# Altium PCB board.PcbDoc
Units mm, origin at the board's own origin, x right, y up, seen from the top; angles counter-clockwise.
Board outline 90 x 100 mm, 2 copper layers (Top Layer, Bottom Layer); 34 components, 42 nets, 133 pads, 0 vias.
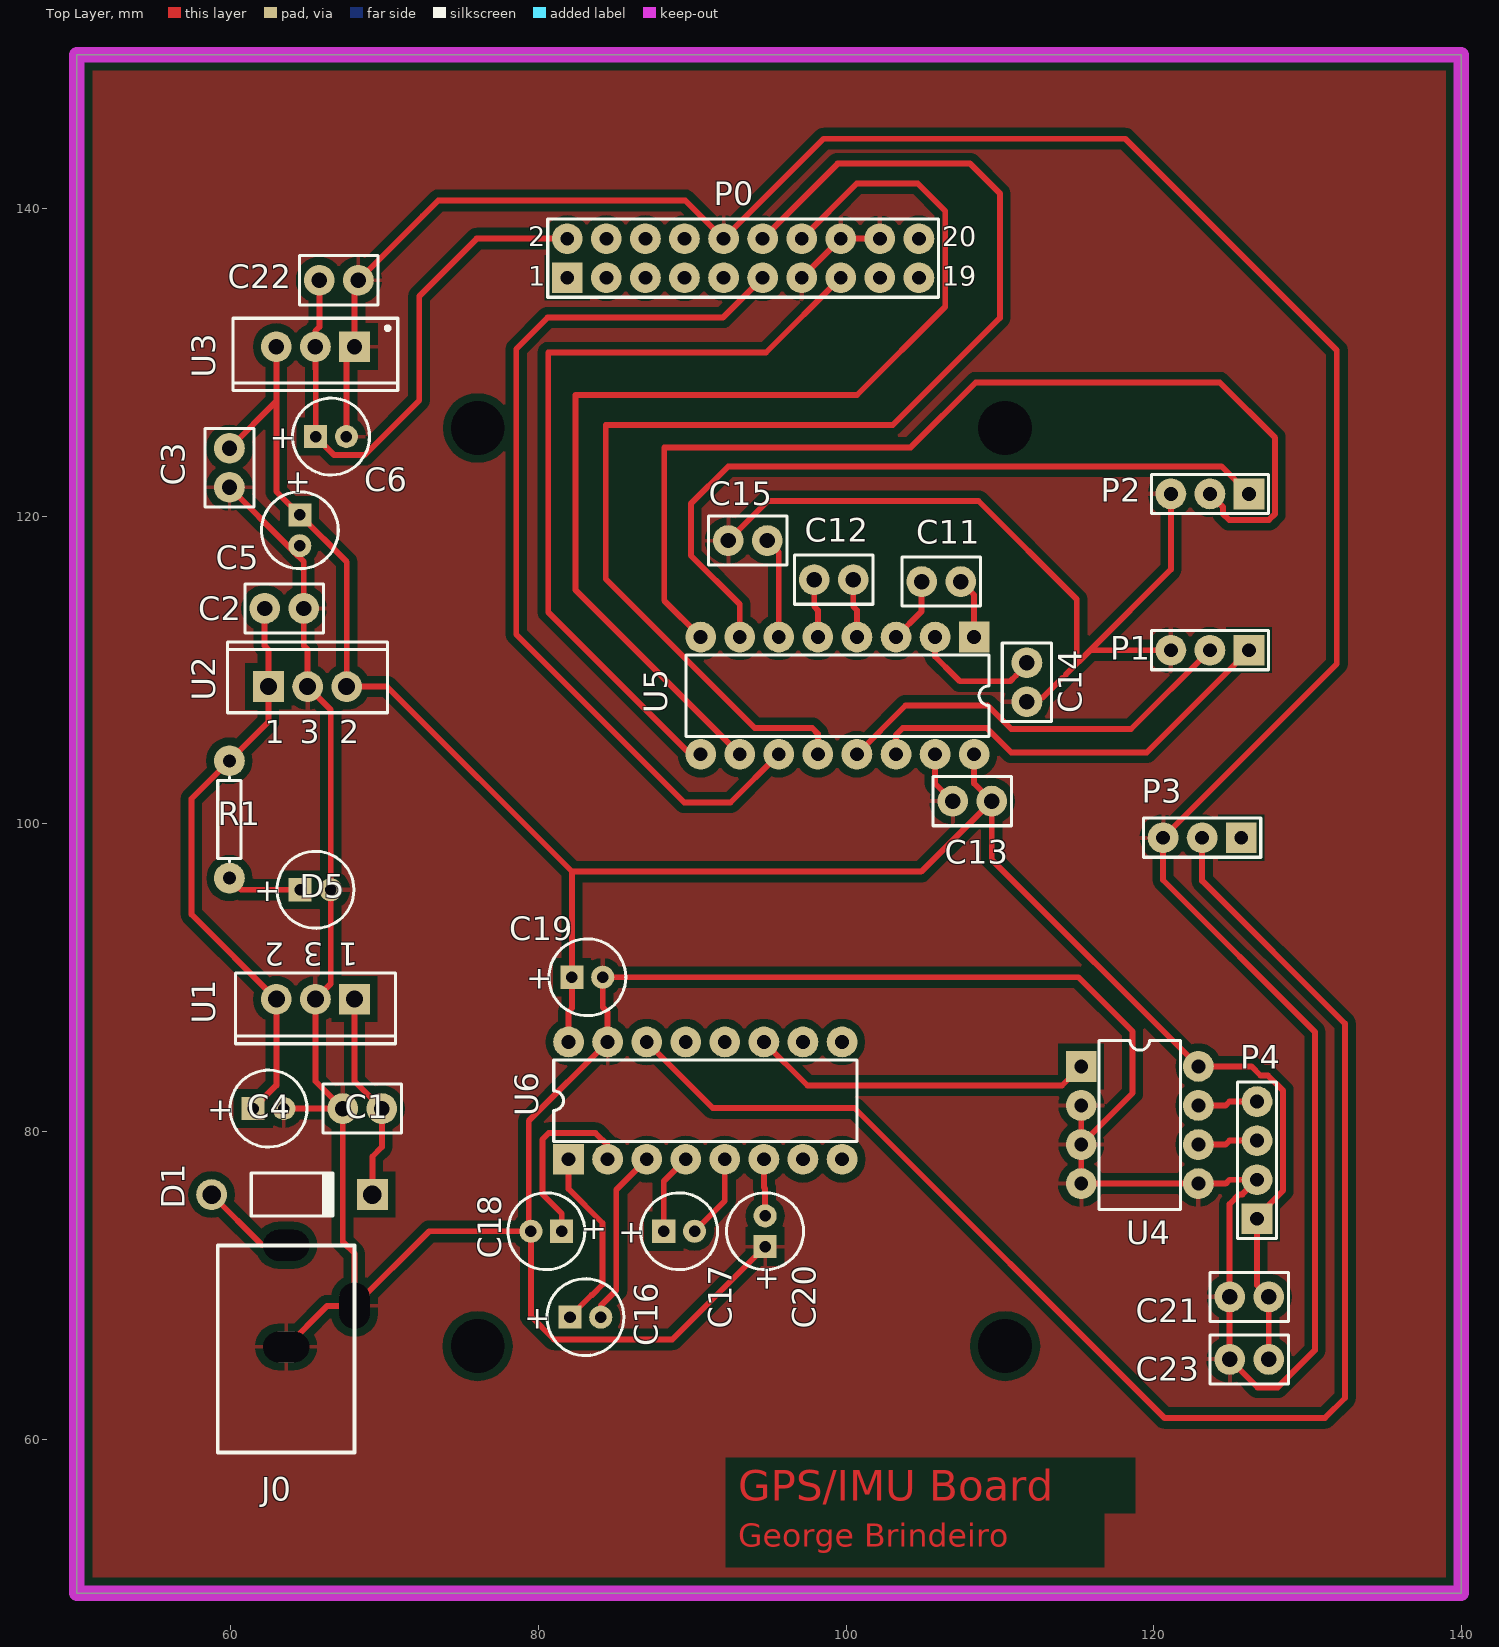
[diagram p0: Top Layer view]
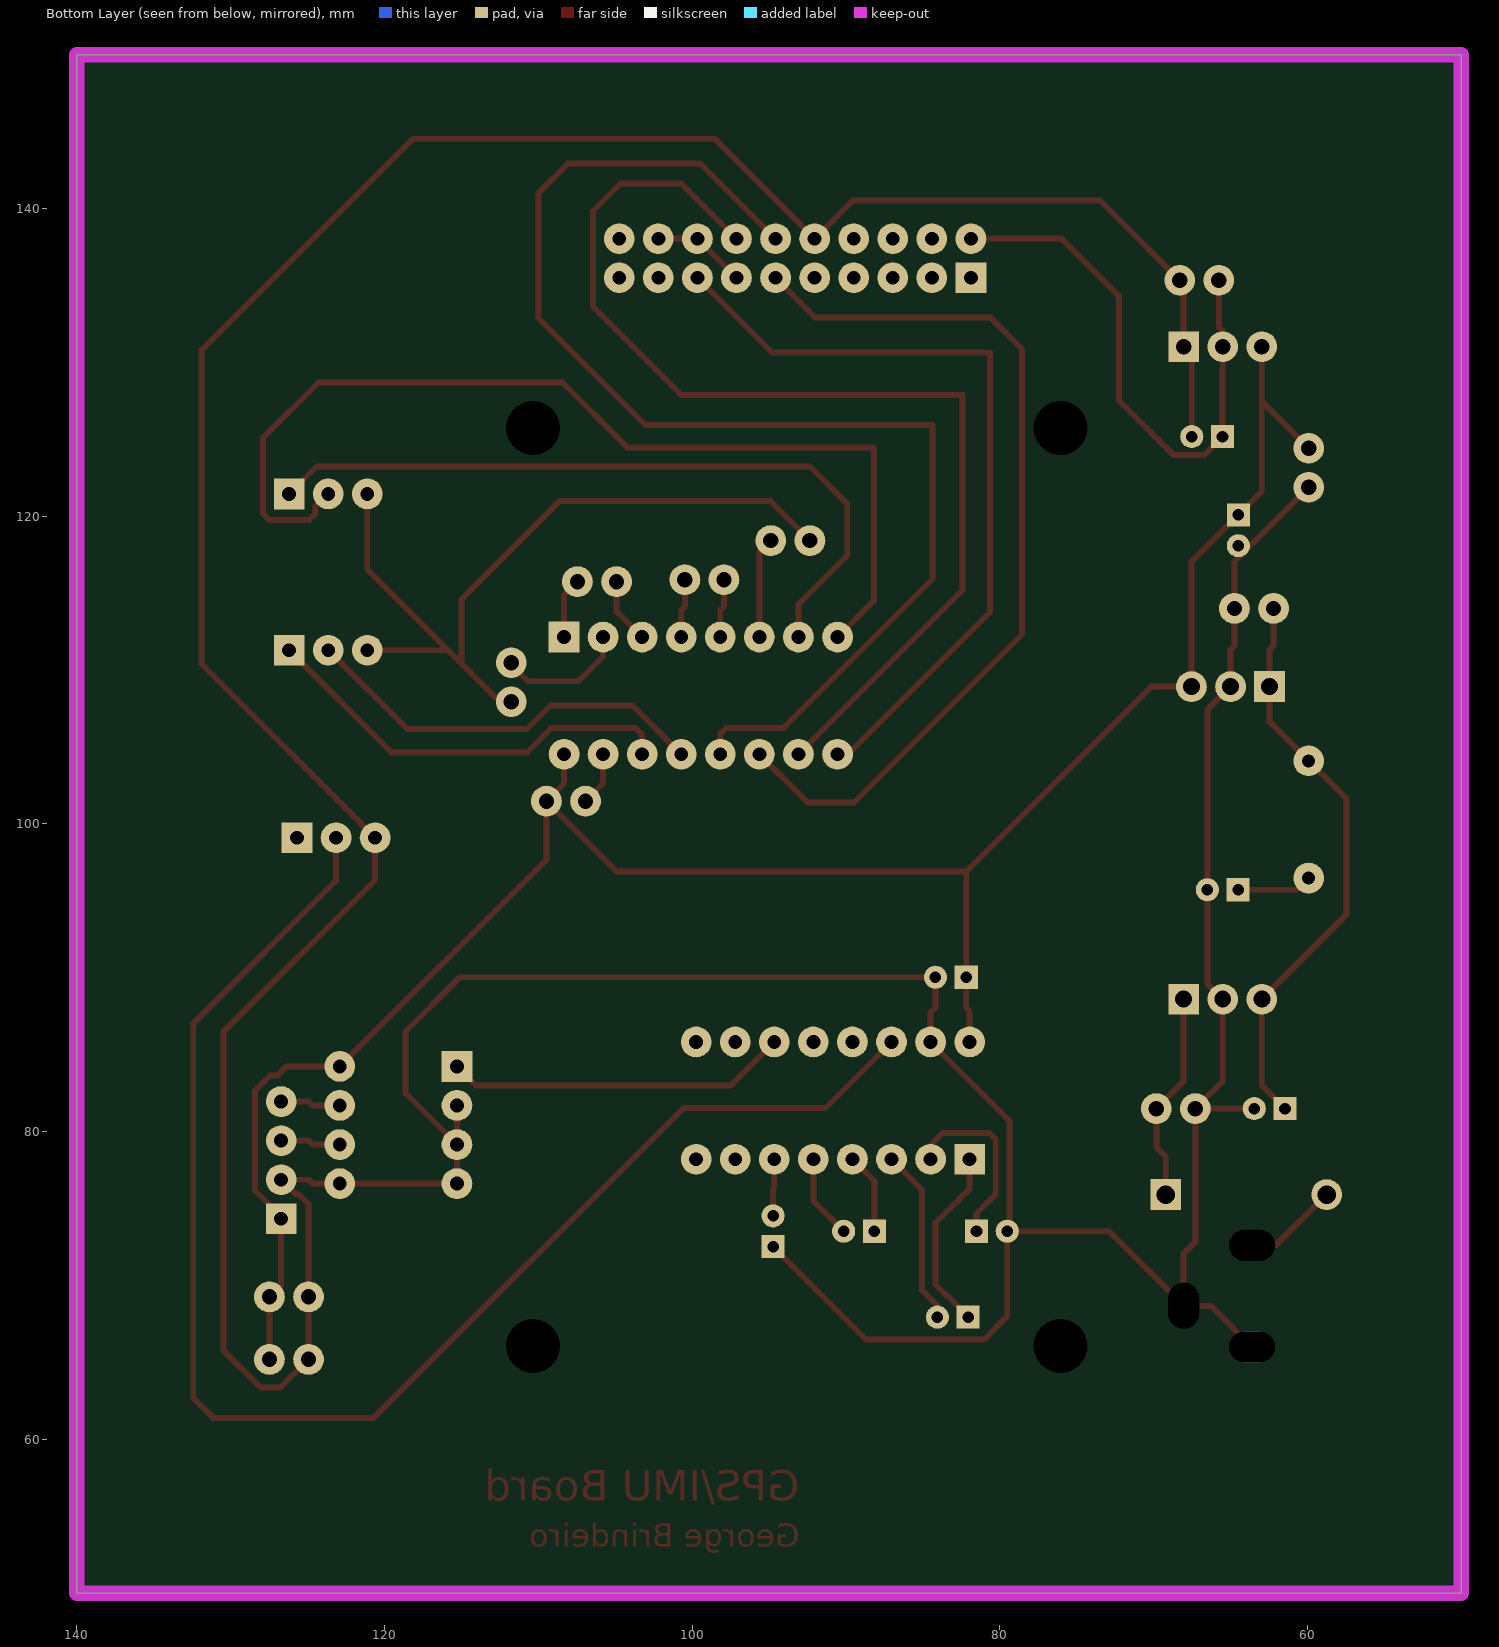
[diagram p1: Bottom Layer view, seen from below]

## Layer stack, top to bottom
Top Layer: signal copper 0.0356
Dielectric: dielectric 0.32, FR-4, Dk 4.8
Bottom Layer: signal copper 0.0356

## Board outline
50,50 140,50 140,150 50,150 50,50

## Design rules (kind name [scope] priority, off if disabled: settings)
Clearance [All] p1: gap=0.508
PolygonConnect [All] p1: connectstyle=Relief reliefconductorwidth=0.254 reliefentries=4 polygonreliefangle="90 Angle"
RoomDefinition schematic [InComponentClass('schematic')] p1: confinementstyle=ConfineIn formatcopy=TRUE lockcomponents=FALSE outline 50,50 140,50 140,150 50,150
RoutingLayers [All] p1: top layer_v5=TRUE bottom layer_v5=FALSE
RoutingVias [All] p1: holewidth=0.711 width=1.27 viastyle="Through Hole" minholewidth=0.711 minwidth=1.27 maxholewidth=0.711 maxwidth=1.27
SilkscreenOverComponentPads [All] p1: minsilkscreentomaskgap=0.254
SolderMaskExpansion [All] p1: expansion=0.102
TestPointUsage [All] p1: valid=0 allowmultiple=FALSE
Testpoint [All] p1: side=15 testpointundercomponent=TRUE minsize=1.016 maxsize=2.54 preferedsize=1.524 minholesize=0 maxholesize=1.016 preferedholesize=0.813 testpointgrid=0.025 style=1023 order=0123456789
Width [All] p1: maxlimit=0.508 minlimit=0.254 preferedwidth=0.381
22 further rules are at their usual default settings.

## Components (designator, comment, footprint, x,y, rotation, side; value= is the part's Value field where it differs from the comment)
C1 "Cap" VP32-3.2 68.556,81.5 r180 top
C2 "Cap" VP32-3.2 63.476,114.012 r0 top
C3 "Cap" VP32-3.2 59.92,123.156 r270 top
C4 "Cap Pol1" B 62.46,81.5 r0 top
C5 "Cap Pol1" B 64.492,119.092 r270 top
C6 "Cap Pol1" B 66.524,125.188 r0 top
C11 "Cap" VP32-3.2 106.188,115.76 r0 top
C12 "Cap" VP32-3.2 99.203,115.887 r0 top
C13 "Cap" VP32-3.2 108.204,101.488 r0 top
C14 "Cap" VP32-3.2 111.76,109.22 r90 top
C15 "Cap" VP32-3.2 93.615,118.427 r0 top
C16 "Cap Pol" B 83.057,67.938 r0 top
C17 "Cap Pol" B 89.153,73.526 r0 top
C18 "Cap Pol" B 80.517,73.526 r180 top
C19 "Cap Pol" B 83.184,90.036 r0 top
C20 "Cap Pol" B 94.741,73.526 r90 top
C21 "Cap" VP32-3.2 126.212,69.256 r0 top
C22 "Cap" VP32-3.2 67.032,135.348 r180 top
C23 "Cap" VP32-3.2 126.212,65.192 r0 top
D1 "Diode 1N4004" DO-41 63.984,75.912 r0 top
D5 "LED0" B 65.508,95.724 r0 top
J0 "DC_POWER" DC_POWER 68.048,59.148 r90 top
P0 "Header 10X2" HDR2X10 81.88,135.512 r0 top
P1 "MHDR1X3" HDR1X3 126.2,111.3 r180 top
P2 "MHDR1X3" HDR1X3 126.2,121.46 r180 top
P3 "MHDR1X3" HDR1X3 125.692,99.108 r180 top
P4 "Header 4" HDR1X4 126.72,74.336 r90 top
R1 "Res1" AXIAL-0.3 59.92,100.296 r90 top
U1 "L7808CV" TO220ABN 65.508,88.612 r180 top
U2 "L7805ACV" TO220ABN 65,108.932 r0 top
U3 "LD33V" T03B 65.508,131.03 r180 top
U4 "SN75176AP" P008 119.1,80.432 r270 top
U5 "MAX3232EEPE" PE16 99.441,108.346 r180 top
U6 "MAX232ACPE" PE16A 90.852,82.019 r0 top

## Footprints (in the part's own frame and the unit in brackets; to place one, negate y for a bottom-side part, rotate by r counter-clockwise, add the part's x,y. Pads: shape width x height; smd on the part's side, far side on the other; paste and mask are expansions set on the pad)
AXIAL-0.3 [mm] "Resistor; 2 Leads"
  round 2 hole 0.85: 1(-3.81,0) 2(3.81,0)
  silkscreen extent -2.77,-0.76 2.77,0.76
B [mm] "Capacitor, Electrolytic, Radial; Body 5 x 6.8 mm (Dia.xH typ); Pin Spacing 2 mm (typ)"
  rect 1.5x1.5 hole 0.75: 1(-1,0)
  round 1.5 hole 0.75: 2(1,0)
  silkscreen extent -2.5,-2.5 2.5,2.5
DC_POWER [mm]
  rrect50% 2x2 hole 2 slot 3 at 90 deg: 1(13.462,4.445) 2(6.858,4.445)
  rrect50% 2x2 hole 2 slot 3 at 0 deg: 3(9.525,0)
  silkscreen extent 0,0 13.46,8.89
DO-41 [mm] "Diode, Axial; Body 5.2 x 2.7 mm (LxDia. max), Lead Dia. 0.86 mm (max)"
  round 2 hole 1.2: 1(-5.23,0)
  rect 2x2 hole 1.2: 2(5.23,0)
  silkscreen extent -2.65,-1.4 2.75,1.4
HDR1X3 [mm] "Connector; Header; 3 Position"
  rect 2x2 hole 0.9: 1(0,0)
  round 2 hole 0.9: 2(2.54,0) 3(5.08,0)
  silkscreen extent -1.27,-1.27 6.35,1.27
HDR1X4 [mm] "Connector; Header; 4 Position"
  rect 2x2 hole 0.9: 1(0,0)
  round 2 hole 0.9: 2(2.54,0) 3(5.08,0) 4(7.62,0)
  silkscreen extent -1.27,-1.27 8.89,1.27
HDR2X10 [mm] "Connector; Header; 10x2 Position"
  rect 2x2 hole 0.9: 1(0,0)
  round 2 hole 0.9: 2(0,2.54) 3(2.54,0) 4(2.54,2.54) 5(5.08,0) 6(5.08,2.54) 7(7.62,0) 8(7.62,2.54) 9(10.16,0) 10(10.16,2.54) 11(12.7,0) 12(12.7,2.54) 13(15.24,0) 14(15.24,2.54) 15(17.78,0) 16(17.78,2.54) 17(20.32,0) 18(20.32,2.54) 19(22.86,0) 20(22.86,2.54)
  silkscreen extent -1.27,-1.27 24.13,3.81
P008 [mm] "DIP; 8 Leads; Row Spacing 7.62 mm; Pitch 2.54 mm"
  rect 2x2 hole 0.9: 1(-3.81,-3.81)
  round 2 hole 0.9: 2(-1.27,-3.81) 3(1.27,-3.81) 4(3.81,-3.81) 5(3.81,3.81) 6(1.27,3.81) 7(-1.27,3.81) 8(-3.81,3.81)
  silkscreen extent -5.5,-2.65 5.5,2.65
PE16 [mm] "DIP; 16 Leads; Row Spacing 7.62 mm; Pitch 2.54 mm"
  rect 2x2 hole 0.9: 1(-8.89,-3.81)
  round 2 hole 0.9: 2(-6.35,-3.81) 3(-3.81,-3.81) 4(-1.27,-3.81) 5(1.27,-3.81) 6(3.81,-3.81) 7(6.35,-3.81) 8(8.89,-3.81) 9(8.89,3.81) 10(6.35,3.81) 11(3.81,3.81) 12(1.27,3.81) 13(-1.27,3.81) 14(-3.81,3.81) 15(-6.35,3.81) 16(-8.89,3.81)
  silkscreen extent -9.85,-2.65 9.85,2.65
PE16A [mm] "DIP; 16 Leads; Row Spacing 7.62 mm; Pitch 2.54 mm"
  rect 2x2 hole 0.9: 1(-8.89,-3.81)
  round 2 hole 0.9: 2(-6.35,-3.81) 3(-3.81,-3.81) 4(-1.27,-3.81) 5(1.27,-3.81) 6(3.81,-3.81) 7(6.35,-3.81) 8(8.89,-3.81) 9(8.89,3.81) 10(6.35,3.81) 11(3.81,3.81) 12(1.27,3.81) 13(-1.27,3.81) 14(-3.81,3.81) 15(-6.35,3.81) 16(-8.89,3.81)
  silkscreen extent -9.85,-2.65 9.85,2.65
T03B [mm] "TO, Thru-Hole, Vertical, Heatsink Mounted; 3 In-Line Leads; Pitch 2.54 mm"
  rect 2x2 hole 1: 1(-2.54,0)
  round 2 hole 1: 2(0,0) 3(2.54,0)
  silkscreen extent -5.35,-1.85 5.35,2.85, body extent -5.4,-1.9 5.4,2.9, height 19.4
TO220ABN [mm] "TO, Thru-Hole, Vertical, Heatsink Mounted; 3 In-Line Leads; Pitch 2.54 mm; Pin sequence 1, 3, 2"
  rect 2x2 hole 1.1: 1(-2.54,0)
  round 2 hole 1.1: 2(2.54,0) 3(0,0)
  silkscreen extent -5.2,-1.7 5.2,2.9
VP32-3.2 [mm] "Capacitor, Ceramic, Thru-Hole, Dipped Radial; Body 5.1 x 3.2 mm (WxT) Pin Spacing 2.54 mm (typ)"
  round 2 hole 1: 1(-1.27,0) 2(1.27,0)
  silkscreen extent -2.55,-1.6 2.55,1.6

## Part data
C1 C2 C3 C11 C12 C13 C14 C15 C21 C22 C23: "Capacitor"
C4 C5 C6: "Polarized Capacitor (Radial)"
C16 C17 C18 C19 C20: library part "Cap Pol1", "Polarized Capacitor (Radial)"
D1: "1 Amp General Purpose Rectifier"
D5: "Typical INFRARED GaAs LED"
J0: "Low Voltage Power Supply Connector"
P0: "Header, 10-Pin, Dual row"
P1 P2 P3: "Header, 3-Pin"
P4: "Header, 4-Pin"
R1: "Resistor"
U1: "Positive Voltage Regulator"
U2: "Precision 1A Regulator"
U3: library part LM1117T-3.3, "800mA Low-Dropout Linear Regulator"
U4: "Differential Bus Transceiver"
U5: "±15kV ESD-Protected, 3.0V to 5.5V, Low-Power, up to 250kbps, True RS-232 Transceiver"
U6: "+5V Powered, Multi-Channel RS-232 Driver/Receiver"

## Free pads (board coordinates)
  round 2 hole 3.5: 0(76.055,125.745) 1(110.345,125.745) 2(110.345,66.055) 3(76.055,66.055)

## Nets (pads, with @x,y where several pads share a name; then routed paths per layer and width w, separated by ;. In a path a pad name is that pad's centre, name@x,y a point inside that pad or via, vN(x,y) a via of type N, cw(c..) or ccw(c..) an arc to the next point about the centre after c; other vN are vias at no path point)
3.3V: C6.1 C22.2 P0.2 U3.2 | length 36.9
  Top Layer w0.381: C22.2 65.762,132.312 65.508,132.058 U3.2 65.508,129.584 65.524,129.568 C6.1 66.732,123.98 68.697,123.98 72.253,127.536 72.253,134.318 75.987,138.052 P0.2
5V: C3.1 C5.1 C13.2 C19.1 C21.2 C23.2 P4.1 U2.2 U3.3 U4.8 U5.16 U6.16 | length 142.8
  Top Layer w0.381: C3.1 62.968,127.474 ; U6.16 81.962,87.811 82.184,88.033 82.184,96.901 104.887,96.901 C13.2 ; 82.184,96.911 70.163,108.932 U2.2 67.54,117.044 C5.1 62.968,121.616 62.968,127.474 ; U5.16 108.331,102.631 C13.2 ; C23.2 127.482,67.211 C21.2 126.72,70.018 P4.1 126.72,74.474 128.418,76.172 128.418,82.66 127.424,83.654 126.943,83.654 126.356,84.242 U4.8 109.474,97.678 C13.2 ; 62.968,127.474 U3.3 62.968,127.474
8V: C2.1 C4.1 R1.2 U1.2 U2.1 | length 37.6
  Top Layer w0.381: C4.1 62.968,83.008 U1.2 57.455,94.125 57.455,101.641 R1.2 62.46,106.646 U2.1 62.46,111.331 62.206,111.585 C2.1
12V: C1.1 D1.2 U1.1 | length 13.7
  Top Layer w0.381: U1.1 68.048,83.278 C1.1 69.826,78.999 69.214,78.387 D1.2
GND: C1.2 C2.2 C3.2 C4.2 C5.2 C6.2 C13.1 C14.1 C15.1 C18.2 C19.2 C20.1 C21.1 C22.1 C23.1 D5.2 J0.2 J0.3 P0.10 P0.13 P0.16 P0.18 P1.3 P2.3 P3.3 P4.2 U1.3 U2.3 U3.1 U4.2 U4.3 U4.4 U4.5 U5.15 U6.15 | length 432
  Top Layer w0.381: C4.2 C1.2 ; J0.2 66.27,68.673 J0.3 ; C5.2 63.714,118.092 ; C6.2 67.524,130.506 U3.1 C22.1@68.048,135.094 ; C22.1 72.479,139.525 73.492,140.538 89.554,140.538 P0.10 98.539,144.551 118.154,144.551 131.902,130.803 131.902,110.398 P3.3 120.612,96.355 130.48,86.487 130.48,65.788 128.068,63.376 126.758,63.376 C23.1 124.942,67.211 C21.1 124.942,75.298 125.568,75.924 125.768,75.924 P4.2 124.933,76.876 124.679,76.622 U4.5 U4.4 U4.3 ; C15.1 94.918,121 108.609,121 115,114.609 115,110.602 ; C20.1 88.704,66.489 81.018,66.489 79.517,67.99 C18.2 ; P0.13 P0.16 P0.18 ; U5.15 105.791,102.631 C13.1 ; C14.1 112.014,108.204 112.776,108.204 114.066,109.494 ; 114.3,109.728 115.872,111.3 ; U4.2 U4.3 ; P1.3 115.872,111.3 ; P2.3 121.12,116.548 115.872,111.3 ; 63.714,118.092 C3.2 63.714,118.092 ; 63.714,118.092 64.103,117.703 64.746,117.06 C2.2 64.746,111.585 65,111.331 U2.3 66.508,107.424 D5.2 66.508,89.612 U1.3 65.508,83.278 C1.2 ; C1.2 67.286,72.839 68.048,72.077 J0.3 ; J0.3 72.901,73.526 C18.2 ; C18.2 79.374,73.668 79.374,80.701 U6.15 84.502,87.76 84.184,88.078 C19.2 115.113,90.036 118.634,86.515 118.634,82.506 U4.3
GPS_CAN2_RX: P0.8
GPS_CAN2_TX: P0.20
GPS_COM1_RX: P0.12 U5.12 | length 84.1
  Top Layer w0.381: P0.12 99.457,142.929 108.071,142.929 110,141 110,132.898 103.035,125.933 84.379,125.933 84.379,115.926 94.07,106.234 97.804,106.234 98.171,105.867 U5.12
GPS_COM1_TX: P0.11 U5.11 | length 59.4
  Top Layer w0.381: P0.11 91.986,132.918 80.594,132.918 78.562,130.886 78.562,112.319 89.481,101.4 92.495,101.4 U5.11
GPS_COM2_RX: P0.15 U5.9 | length 51.6
  Top Layer w0.381: U5.9 89.876,104.536 80.645,113.767 80.645,130.658 94.806,130.658 P0.15
GPS_COM2_TX: P0.14 U5.10 | length 71.9
  Top Layer w0.381: U5.10 82.423,115.204 82.423,127.889 100.711,127.889 106.451,133.629 106.451,139.846 104.664,141.633 100.701,141.633 P0.14
GPS_EVENT1: P0.9
GPS_EVENT2: P0.7
GPS_LNA_PWR: P0.1
GPS_PPS: P0.19
GPS_PV: P0.17
GPS_RESETIN: P0.5
GPS_USB_D+: P0.4
GPS_USB_D-: P0.3
GPS_VARF: P0.6
IMU_HRS_A: P4.3 U4.6 | length 3.9
  Top Layer w0.381: U4.6 124.679,79.162 124.933,79.416 P4.3
IMU_HRS_B: P4.4 U4.7 | length 3.9
  Top Layer w0.381: U4.7 124.679,81.702 124.933,81.956 P4.4
IMU_TX: U4.1 U6.11 | length 22.3
  Top Layer w0.381: U6.11 97.491,83 114.048,83 U4.1
J1_RX: P1.2 U5.13 | length 27
  Top Layer w0.381: U5.13 103.874,107.699 109.217,107.699 110.744,106.172 118.532,106.172 P1.2
J1_TX: P1.1 U5.14 | length 27.8
  Top Layer w0.381: U5.14 103.251,105.794 103.691,106.234 109.158,106.234 110.744,104.648 119.548,104.648 P1.1
J2_RX: P2.2 U5.8 | length 66.6
  Top Layer w0.381: U5.8 88.189,114.518 88.189,124.485 104.214,124.485 108.433,128.705 124.298,128.705 127.899,125.104 127.899,120.171 127.489,119.762 124.911,119.762 124.502,120.171 124.502,120.619 P2.2
J2_TX: P2.1 U5.7 | length 48
  Top Layer w0.381: U5.7 93.091,114.284 89.916,117.459 89.916,120.815 92.342,123.241 124.419,123.241 P2.1
J3_RX: P3.2 U6.14 | length 96.3
  Top Layer w0.381: U6.14 91.334,81.537 100.556,81.537 120.698,61.395 131.143,61.395 132.436,62.687 132.436,87.02 123.152,96.304 P3.2
NetC11_1: C11.1 U5.3 | length 4.3
  Top Layer w0.381: U5.3 104.918,113.823 C11.1
NetC11_2: C11.2 U5.1 | length 4
  Top Layer w0.381: C11.2 108.331,114.887 U5.1
NetC12_1: C12.1 U5.5 | length 3.8
  Top Layer w0.381: C12.1 97.933,114.135 98.171,113.897 U5.5
NetC12_2: C12.2 U5.4 | length 3.8
  Top Layer w0.381: C12.2 100.473,114.135 100.711,113.897 U5.4
NetC14_2: C14.2 U5.2 | length 7.6
  Top Layer w0.381: U5.2 105.791,110.89 107.07,109.61 ; 107.271,109.41 107.07,109.61 ; 111.056,109.648 110.686,109.278 107.403,109.278 107.07,109.61
NetC15_2: C15.2 U5.6 | length 6.6
  Top Layer w0.381: C15.2 95.631,117.681 U5.6
NetC16_1: C16.1 U6.1 | length 12.1
  Top Layer w0.381: U6.1 81.962,76.279 84.176,74.066 84.176,70.057 83.505,69.386 83.457,69.386 82.057,67.986 C16.1
NetC16_2: C16.2 U6.3 | length 11.5
  Top Layer w0.381: C16.2 84.057,68.681 85.065,69.688 85.065,76.232 U6.3
NetC17_1: C17.1 U6.4 | length 5.3
  Top Layer w0.381: C17.1 88.153,76.78 U6.4
NetC17_2: C17.2 U6.5 | length 5.5
  Top Layer w0.381: C17.2 92.122,75.495 U6.5
NetC18_1: C18.1 U6.2 | length 12.1
  Top Layer w0.381: C18.1 81.517,74.679 80.263,75.932 80.263,79.498 80.673,79.907 83.706,79.907 84.502,79.112 U6.2
NetC20_2: C20.2 U6.6 | length 3.7
  Top Layer w0.381: U6.6 94.662,76.384 94.741,76.305 C20.2
NetD1_1: D1.1 J0.1 | length 6.2
  Top Layer w0.381: D1.1 62.056,72.61 J0.1
NetD5_1: D5.1 R1.1 | length 4.9
  Top Layer w0.381: R1.1 60.682,95.724 D5.1
pads on no net: P3.1 U6.7 U6.8 U6.9 U6.10 U6.12 U6.13

## Polygon pours and split planes (outlines as drawn)
GND on Top Layer "Top Layer-GND" (solid, remove dead copper, pour order 1000): 50,150 140,150 140,50 50,50 50,150

## Keep-outs
Keep-Out Layer:
  the board outline again, w1

## Other copper
Top Layer:
  text "GPS/IMU Board" at 93,56 h2
  text "George Brindeiro" at 93,53 h1.5

## Text inside footprints (layer, text, board x,y; h text height)
C4: Top Overlay "+" at 58.485,80.75 h1.5
C5: Top Overlay "+" at 63.742,123.067 h1.5 r270
C6: Top Overlay "+" at 62.549,124.438 h1.5
C16: Top Overlay "+" at 79.082,67.188 h1.5
C17: Top Overlay "+" at 85.178,72.776 h1.5
C18: Top Overlay "+" at 84.492,74.276 h1.5 r180
C19: Top Overlay "+" at 79.209,89.286 h1.5
C20: Top Overlay "+" at 95.491,69.551 h1.5 r90
D5: Top Overlay "+" at 61.533,94.974 h1.5
P0: Top Overlay "20" at 106.264,137.544 h1.27; Top Overlay "19" at 106.264,135.004 h1.27; Top Overlay "1" at 79.34,135.004 h1.27; Top Overlay "2" at 79.34,137.544 h1.27
U1: Top Overlay "1" at 68.298,92.287 h1.5 r180; Top Overlay "2" at 63.468,92.287 h1.5 r180; Top Overlay "3" at 66.008,92.287 h1.5 r180
U2: Top Overlay "1" at 62.21,105.257 h1.5; Top Overlay "2" at 67.04,105.257 h1.5; Top Overlay "3" at 64.5,105.257 h1.5